# Altium PCB Steering_Wheel_ECU.PcbDoc
Units mm, origin at the board's own origin, x right, y up, seen from the top; angles counter-clockwise.
Board outline 42.72 x 25.12 mm, 2 copper layers (Top Layer, Bottom Layer); 57 components, 30 nets, 156 pads, 10 vias.
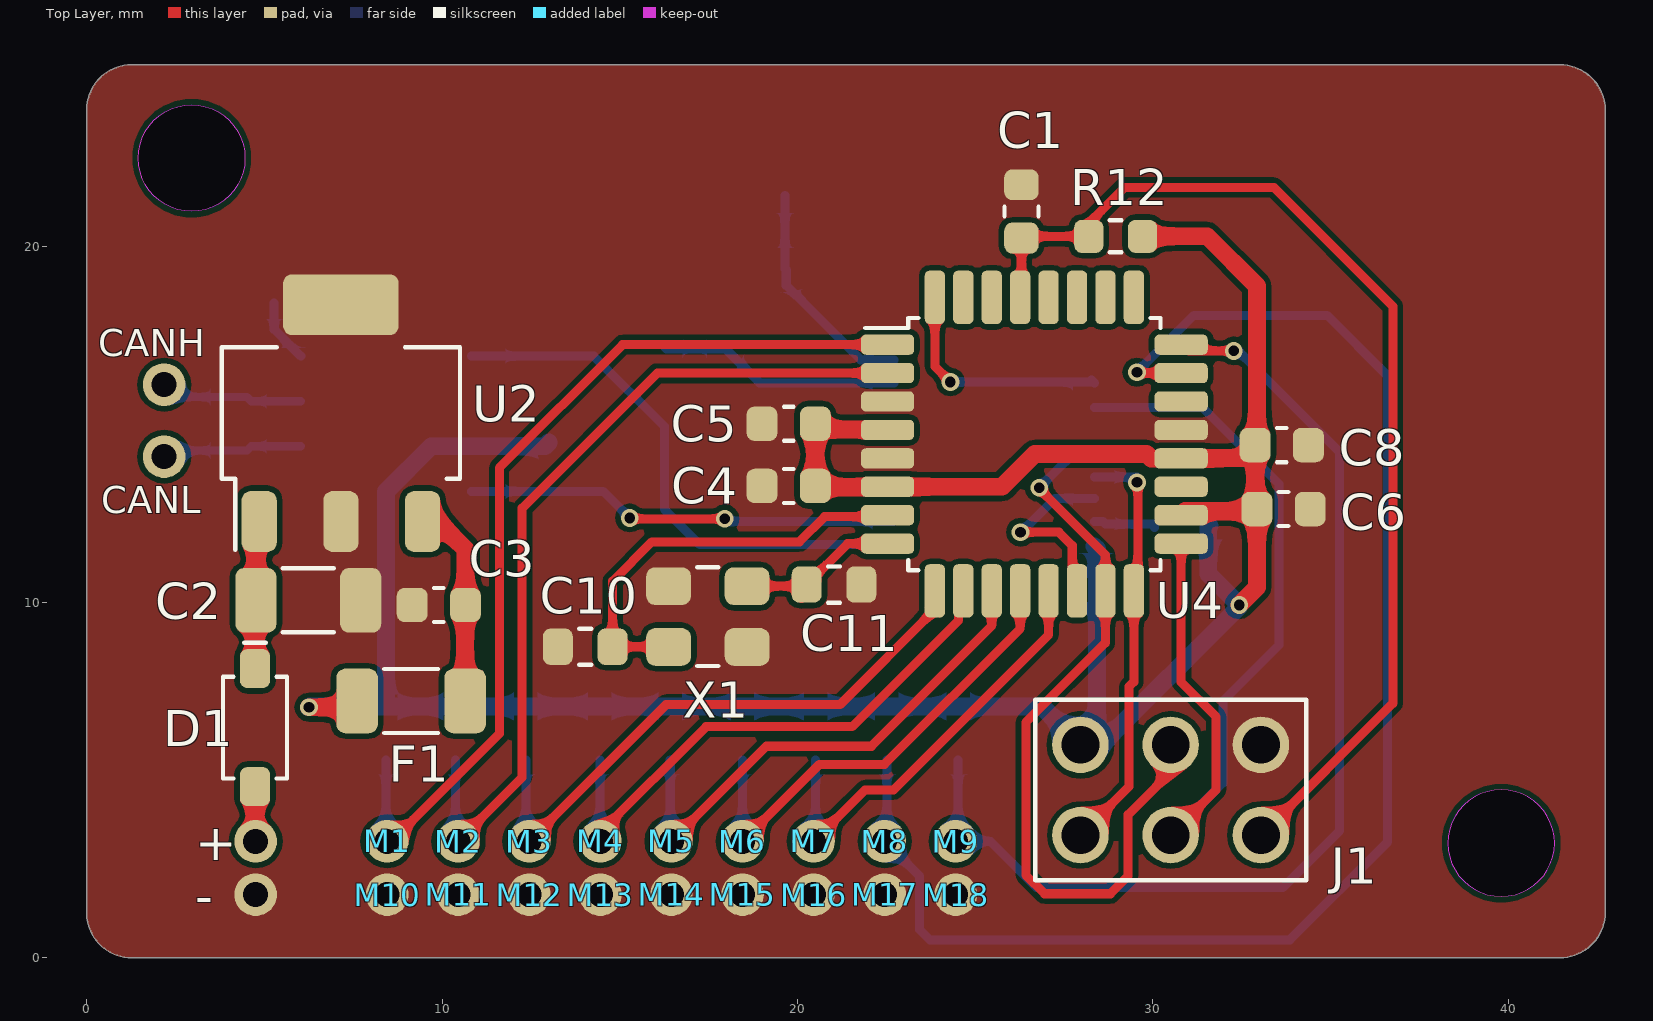
[diagram p0: Top Layer view]
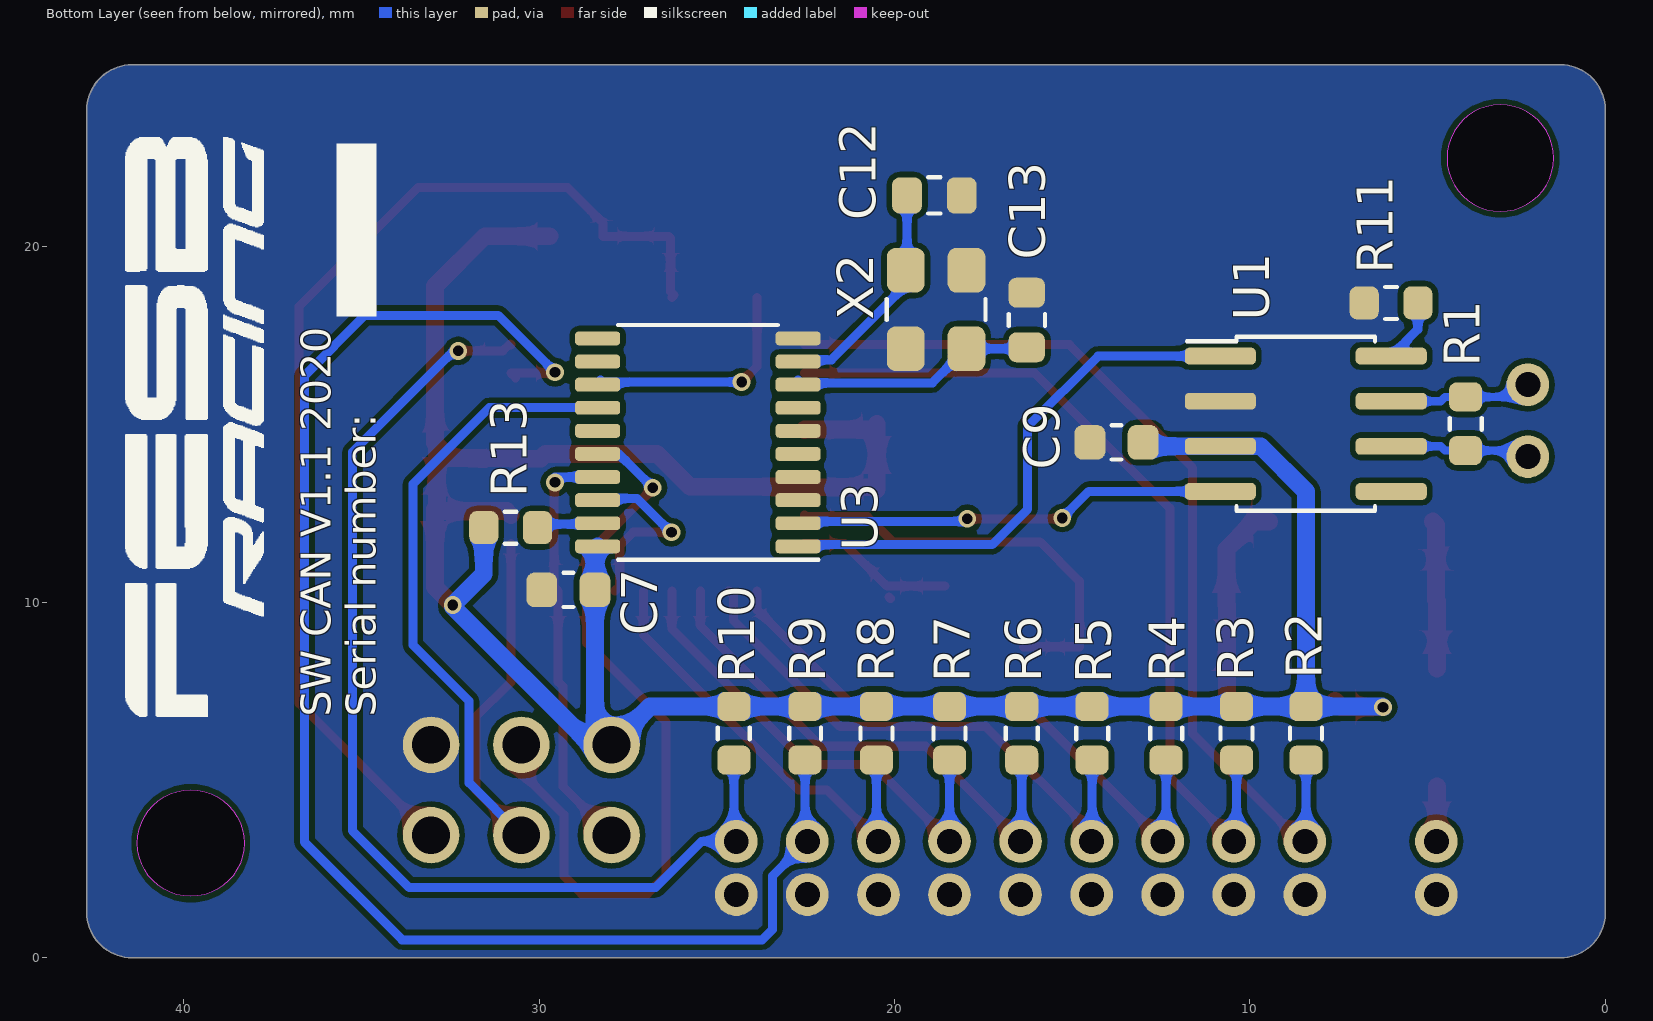
[diagram p1: Bottom Layer view, seen from below]
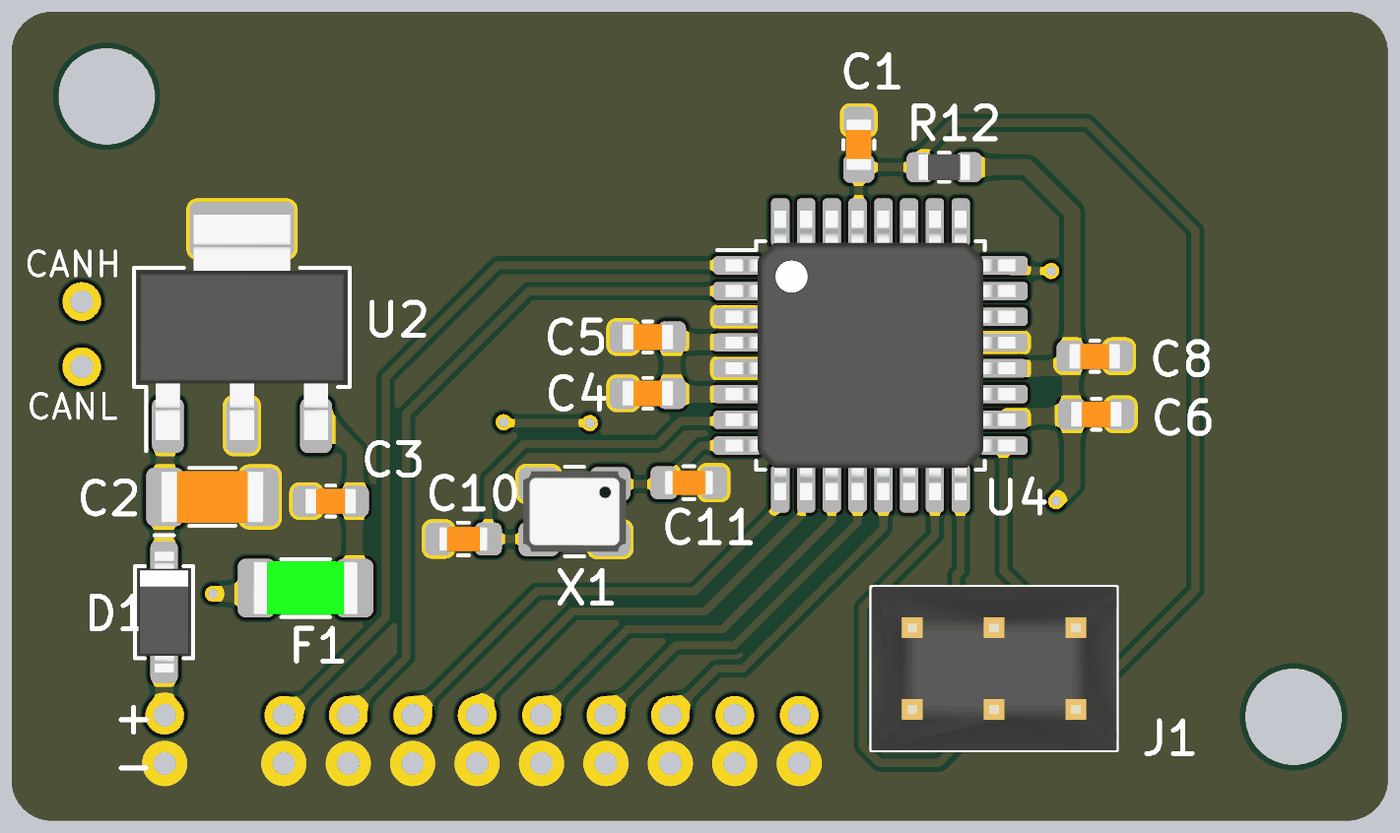
[diagram p2: 3D render of the assembled board from above, using the file's embedded part models]
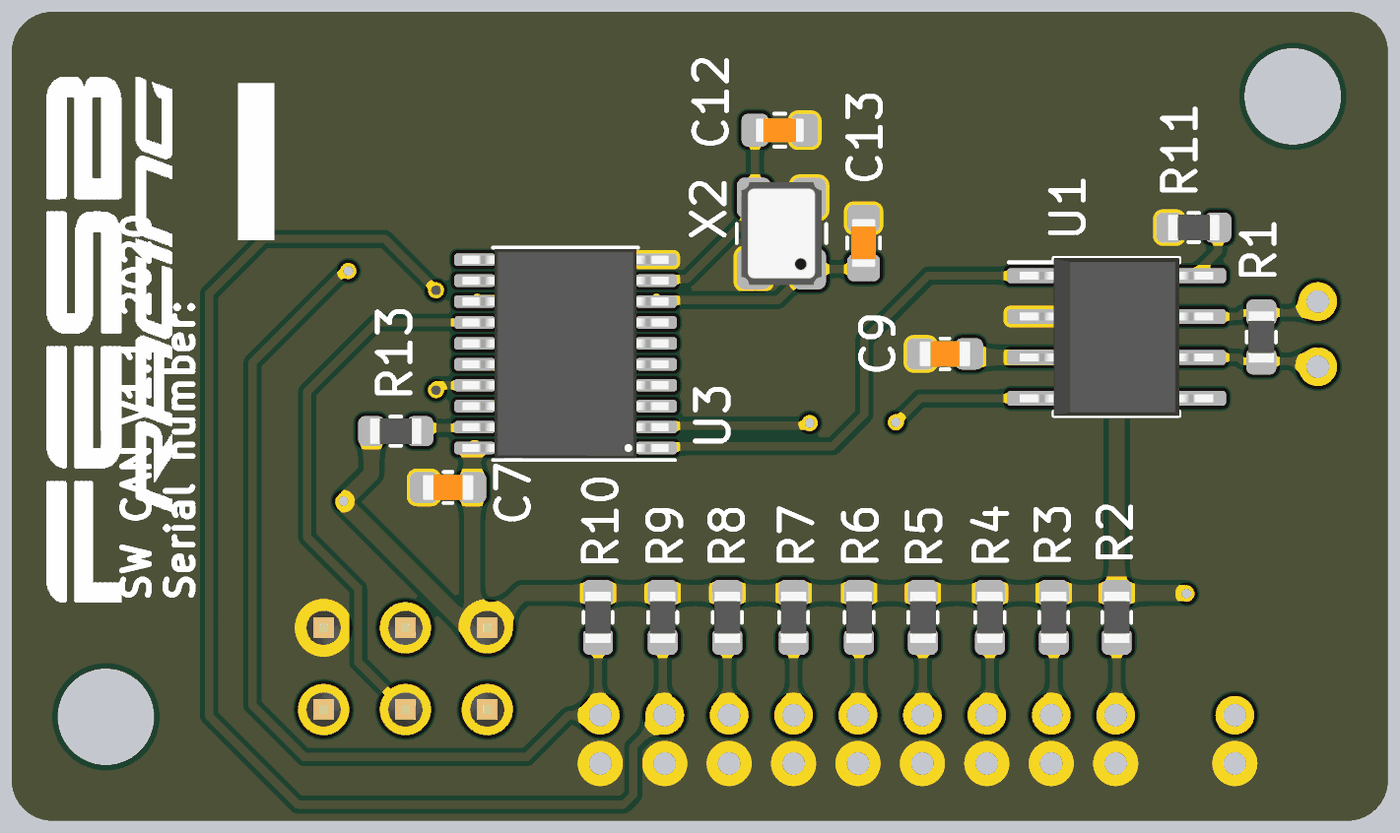
[diagram p3: 3D render of the assembled board from below, using the file's embedded part models]

## Layer stack, top to bottom
Top Solder: solder mask 0.0102, Solder Resist, Dk 3.5
Top Layer: signal copper 0.0356
Dielectric 1: dielectric 0.32, FR-4, Dk 4.8
Bottom Layer: signal copper 0.0356
Bottom Solder: solder mask 0.0102, Solder Resist, Dk 3.5

## Board outline
1.25,0 cw(c1.25,1.25) 0,1.25 0,23.875 cw(c1.25,23.875) 1.25,25.125 41.455,25.125 cw(c41.455,23.855) 42.725,23.855 42.725,1.27 cw(c41.455,1.27) 41.455,0
cut-out: 38.3,3.225 ccw(c39.8,3.225) 39.8,1.725 ccw(c39.8,3.225) 41.3,3.225 ccw(c39.8,3.225) 39.8,4.725 ccw(c39.8,3.225)
cut-out: 2.95,21 cw(c2.95,22.5) 1.45,22.5 cw(c2.95,22.5) 2.95,24 cw(c2.95,22.5) 4.45,22.5 cw(c2.95,22.5)

## Design rules (kind name [scope] priority, off if disabled: settings)
Clearance [All] p1: gap=0.15 ignorepadtopadclearanceinfootprint=FALSE except(0: Arc-Hole Track-Hole SMDPad-Hole THPad-Hole Via-Hole Fill-Hole Poly-Hole Region-Hole Text-Hole)
ComponentClearance [All] p1: gap=0 collisioncheckmode=3 verticalgap=0.254 showdistances=FALSE
DiffPairsRouting 120R [All] p1: maxlimit=0.1 minlimit=0.1 mostfreqgap=0.1 toplayer_minwidth=0.23 toplayer_maxwidth=0.23 toplayer_prefwidth=0.23 bottomlayer_minwidth=0.23 bottomlayer_maxwidth=0.23 bottomlayer_prefwidth=0.23 maxuncoupledlength=12.7
DiffPairsRouting 90R [All] p2: maxlimit=0.3 minlimit=0.2 mostfreqgap=0.2 toplayer_minwidth=1.24 toplayer_maxwidth=1.5 toplayer_prefwidth=1.24 bottomlayer_minwidth=1.24 bottomlayer_maxwidth=1.5 bottomlayer_prefwidth=1.24 maxuncoupledlength=12.7
HoleSize [All] p1: absolutevalues=TRUE maxlimit=6.3 minlimit=0.2 maxpercent=80.000 minpercent=20.000
MinimumAnnularRing [All] p1: minimumring=0.076
MinimumSolderMaskSliver [All] p1: minsoldermaskwidth=0
PlaneClearance [All] p1: clearance=0.3
PlaneConnect [All] p1: planeconnectstyle=Direct reliefexpansion=0.508 reliefentries=4 reliefconductorwidth=0.254 reliefairgap=0.254
PolygonConnect [All] p1: connectstyle=Direct reliefconductorwidth=0.254 reliefentries=4 polygonreliefangle="90 Angle" airgapwidth=0.254
RoutingVias [All] p1: holewidth=0.3 width=0.5 viastyle="Through Hole" minholewidth=0.2 minwidth=0.45 maxholewidth=0.3 maxwidth=0.5
SilkToSilkClearance [All] p1: silktosilkclearance=0.15
SilkToSolderMaskClearance [IsPad] p1: minsilkscreentomaskgap=0.1 clearancetoexposedcopper=TRUE
SolderMaskExpansion [All] p1: expansion=0.102
Width [All] p1: maxlimit=10 minlimit=0.2 preferedwidth=0.254
22 further rules are at their usual default settings.

## Classes and differential pairs
differential pair CAN: +CAN_P -CAN_N

## Components (designator, comment, footprint, x,y, rotation, side; value= is the part's Value field where it differs from the comment)
+ "0.7mm" HOLE_0.7MM#1 4.75,2.4 r0 top
- "0.7mm" HOLE_0.7MM#2 4.75,1.775 r0 top
C1 "100nF" CAPC160X80X87L35N 26.3,21 r90 top
C2 "330nF" CAPC320X160X90L50N 6.232,10.056 r180 top
C3 "100nF" CAPC160X80X87L35N 9.904,9.925 r180 top
C4 "100nF" CAPC160X80X87L35N 19.75,13.275 r180 top
C5 "100nF" CAPC160X80X87L35N 19.75,15.025 r180 top
C6 "100nF" CAPC160X80X87L35N 33.675,12.625 r0 top
C7 "100nF" CAPC160X80X87L35N 29.175,10.35 r0 bottom
C8 "100nF" CAPC160X80X87L35N 33.625,14.425 r0 top
C9 "100nF" CAPC160X80X87L35N 13.75,14.5 r0 bottom
C10 "18pF" CAPC152X76X91L25N 14.025,8.75 r180 top
C11 "18pF" CAPC152X76X91L25N 21.025,10.5 r0 top
C12 "18pF" CAPC152X76X91L25N 18.875,21.45 r180 bottom
C13 "18pF" CAPC152X76X91L25N 16.275,17.945 r90 bottom
CANH "0.7mm" HOLE_0.7MM#2 2.175,16.125 r270 top
CANL "0.7mm" HOLE_0.7MM#2 2.175,14.1 r270 top
D1 "MBR0540" SOD375X160X128L31X60N 4.733,6.474 r270 top
F1 "250mA" FUSC325X165X75L42N 9.125,7.225 r0 top
J1 "Header_2x3" HDRV6W64P254_3X2_762X508H1100N 27.96,3.45 r0 top
M1 "0.7mm" HOLE_0.7MM#2 8.45,3.275 r0 top locked
M2 "0.7mm" HOLE_0.7MM#2 10.45,3.275 r0 top locked
M3 "0.7mm" HOLE_0.7MM#2 12.45,3.275 r0 top locked
M4 "0.7mm" HOLE_0.7MM#2 14.45,3.275 r0 top locked
M5 "0.7mm" HOLE_0.7MM#2 16.45,3.275 r0 top locked
M6 "0.7mm" HOLE_0.7MM#2 18.45,3.275 r0 top locked
M7 "0.7mm" HOLE_0.7MM#2 20.45,3.275 r0 top locked
M8 "0.7mm" HOLE_0.7MM#2 22.45,3.275 r0 top locked
M9 "0.7mm" HOLE_0.7MM#2 24.45,3.275 r0 top locked
M10 "0.7mm" HOLE_0.7MM#2 8.45,1.775 r270 top locked
M11 "0.7mm" HOLE_0.7MM#2 10.45,1.775 r0 top locked
M12 "0.7mm" HOLE_0.7MM#2 12.45,1.775 r90 top locked
M13 "0.7mm" HOLE_0.7MM#2 14.45,1.775 r90 top locked
M14 "0.7mm" HOLE_0.7MM#2 16.45,1.775 r90 top locked
M15 "0.7mm" HOLE_0.7MM#2 18.45,1.775 r90 top locked
M16 "0.7mm" HOLE_0.7MM#2 20.45,1.775 r90 top locked
M17 "0.7mm" HOLE_0.7MM#2 22.45,1.775 r90 top locked
M18 "0.7mm" HOLE_0.7MM#2 24.45,1.775 r90 top locked
R1 "120R" RESC160X80X50L30N 3.925,15.025 r270 bottom
R2 "10K" RESC160X80X50L30N 8.416,6.315 r270 bottom locked
R3 "10K" RESC160X80X50L30N 10.372,6.315 r90 bottom locked
R4 "10K" RESC160X80X50L30N 12.353,6.315 r90 bottom locked
R5 "10K" RESC160X80X50L30N 14.436,6.315 r90 bottom locked
R6 "10K" RESC160X80X50L30N 16.417,6.315 r90 bottom locked
R7 "10K" RESC160X80X50L30N 18.449,6.315 r90 bottom locked
R8 "10K" RESC160X80X50L30N 20.506,6.315 r90 bottom locked
R9 "10K" RESC160X80X50L30N 22.513,6.315 r90 bottom locked
R10 "10K" RESC160X80X50L30N 24.52,6.315 r90 bottom locked
R11 "20K" RESC160X80X50L30N 6.025,18.425 r180 bottom
R12 "10K" RESC160X80X50L30N 28.95,20.3 r0 top
R13 "10K" RESC160X80X50L30N 30.8,12.1 r0 bottom
U1 "MCP2551" SOIC8P127_490X600X175L83X24N 8.425,15.025 r270 bottom
U2 "LM7805" SOT223-4P230_700X180L80X75N 7.15,15.325 r0 top locked
U3 "MCP2515T" SOP20P65_650X640X120L60X24N 25.53,14.501 r90 bottom
U4 "Atmega328p" QFP32P80_900X900X120L60X37N 26.663,14.452 r270 top
X1 "16 MHz" OSCCC320X250X60L90X110N 17.475,9.6 r180 top
X2 "16 MHz" OSCCC320X250X60L90X110N 18.827,18.24 r90 bottom

## Footprints (in the part's own frame and the unit in brackets; to place one, negate y for a bottom-side part, rotate by r counter-clockwise, add the part's x,y. Pads: shape width x height; smd on the part's side, far side on the other; paste and mask are expansions set on the pad)
CAPC152X76X91L25N [mm] "Capacitor, Chip; 1.52 mm L X 0.76 mm W X 0.91 mm H body"
  rrect50% 0.84x1.02 smd: 1(-0.77,0) 2(0.77,0)
  silkscreen extent -0.17,-0.51 0.17,0.51, body extent -1.4,-0.7 1.4,0.7, height 2
CAPC160X80X87L35N [mm] "Capacitor, Chip; 1.60 mm L X 0.80 mm W X 0.87 mm H body"
  rrect51% 0.87x0.97 smd: 1(-0.75,0) 2(0.75,0)
  silkscreen extent -0.14,-0.48 0.14,0.48, body extent -1.39,-0.69 1.39,0.69, height 0.87
CAPC320X160X90L50N [mm] "Capacitor, Chip; 3.20 mm L X 1.60 mm W X 0.90 mm H body"
  rrect43% 1.16x1.82 smd: 1(-1.475,0) 2(1.475,0)
  silkscreen extent -0.71,-0.9 0.71,0.9, body extent -2.27,-1.12 2.27,1.12, height 1
FUSC325X165X75L42N [mm] "Fuse, Chip; 3.25 mm L X 1.65 mm W X 0.75 mm H body"
  rrect43% 1.17x1.82 smd: 1(-1.52,0) 2(1.52,0)
  silkscreen extent -0.75,-0.9 0.75,0.9, body extent -2.31,-1.11 2.31,1.11, height 1
HDRV6W64P254_3X2_762X508H1100N [mm] "Header, Vertical, 2.54 mm pitch; 0.64 mm lead width, 6 pins, 2 rows, 3 pins per row, 7.62 mm L X 5.08 mm W X 11.00 mm H body"
  round 1.59 hole 1.06 paste-1.59: 1(0,0) 2(0,2.54) 3(2.54,0) 4(2.54,2.54) 5(5.08,0) 6(5.08,2.54)
  silkscreen extent -1.27,-1.27 6.35,3.81, body extent -1.52,-1.52 6.6,4.06, height 11
HOLE_0.7MM#1 [mm]
  round 1.2 hole 0.7: 1(0,0.875)
HOLE_0.7MM#2 [mm]
  round 1.2 hole 0.7: 1(0,0)
OSCCC320X250X60L90X110N [mm] "Oscillator, Corner Concave; 3.20 mm L X 2.50 mm W X 0.60 mm H body"
  rrect47% 1.26x1.06 smd: 1(-1.105,-0.855) 2(1.105,-0.855) 3(1.105,0.855) 4(-1.105,0.855)
  silkscreen extent -0.3,-1.39 0.3,1.39, body extent -2.16,-1.91 1.95,1.6, height 2
QFP32P80_900X900X120L60X37N [mm] "Quad Flat Pack (QFP), 0.80 mm pitch; square, 8 pin X 8 pin, 7.00 mm L X 7.00 mm W X 1.20 mm H body"
  rrect49% 0.57x1.5 smd: 1(-2.8,-4.13) 2(-2,-4.13) 3(-1.2,-4.13) 4(-0.4,-4.13) 5(0.4,-4.13) 6(1.2,-4.13) 7(2,-4.13) 8(2.8,-4.13) 17(2.8,4.13) 18(2,4.13) 19(1.2,4.13) 20(0.4,4.13) 21(-0.4,4.13) 22(-1.2,4.13) 23(-2,4.13) 24(-2.8,4.13)
  rrect49% 1.5x0.57 smd: 9(4.13,-2.8) 10(4.13,-2) 11(4.13,-1.2) 12(4.13,-0.4) 13(4.13,0.4) 14(4.13,1.2) 15(4.13,2) 16(4.13,2.8) 25(-4.13,2.8) 26(-4.13,2) 27(-4.13,1.2) 28(-4.13,0.4) 29(-4.13,-0.4) 30(-4.13,-1.2) 31(-4.13,-2) 32(-4.13,-2.8)
  silkscreen extent -3.55,-4.76 3.55,3.55, body extent -5.08,-5.08 5.08,5.08, height 1.2
RESC160X80X50L30N [mm] "Resistor, Chip; 1.60 mm L X 0.80 mm W X 0.50 mm H body"
  rrect51% 0.82x0.93 smd: 1(-0.755,0) 2(0.755,0)
  silkscreen extent -0.17,-0.45 0.17,0.45, body extent -1.37,-0.67 1.37,0.67, height 1
SOD375X160X128L31X60N [mm] "Diode, Small Outline Diode (SOD); 2.70 mm L X 1.60 mm W X 1.28 mm H body"
  rrect49% 1.1x0.85 smd: A(1.66,0) C(-1.66,0)
  silkscreen extent -2.39,-0.9 1.43,0.9, body extent -2.41,-1.1 2.41,1.1, height 1.28
SOIC8P127_490X600X175L83X24N [mm] "Small Outline IC (SOIC), 1.27 mm pitch; 8 pin, 4.90 mm L X 3.90 mm W X 1.75 mm H body"
  rrect51% 0.47x2 smd: 1(-1.905,-2.405) 2(-0.635,-2.405) 3(0.635,-2.405) 4(1.905,-2.405) 5(1.905,2.405) 6(0.635,2.405) 7(-0.635,2.405) 8(-1.905,2.405)
  silkscreen extent -2.45,-3.34 2.45,1.95, body extent -2.45,-3 2.45,3, height 1.75
SOP20P65_650X640X120L60X24N [mm] "Small Outline Pkg (SOP), 0.65 mm pitch; 20 pin, 6.50 mm L X 4.40 mm W X 1.20 mm H body"
  rrect51% 0.39x1.27 smd: 1(-2.925,-2.82) 2(-2.275,-2.82) 3(-1.625,-2.82) 4(-0.975,-2.82) 5(-0.325,-2.82) 6(0.325,-2.82) 7(0.975,-2.82) 8(1.625,-2.82) 9(2.275,-2.82) 10(2.925,-2.82) 11(2.925,2.82) 12(2.275,2.82) 13(1.625,2.82) 14(0.975,2.82) 15(0.325,2.82) 16(-0.325,2.82) 17(-0.975,2.82) 18(-1.625,2.82) 19(-2.275,2.82) 20(-2.925,2.82)
  silkscreen extent -3.3,-3.39 3.3,2.25, body extent -3.25,-3.2 3.25,3.2, height 1.2
SOT223-4P230_700X180L80X75N [mm] "Small Outline Transistor (SOT223), 2.30 mm pitch; 4 pin, 6.50 mm L X 3.50 mm W X 1.80 mm H body"
  rrect51% 0.99x1.71 smd: 1(-2.3,-3.05) 2(0,-3.05) 3(2.3,-3.05)
  rrect29% 3.25x1.71 smd: 2(0,3.05)
  silkscreen extent -3.35,-3.85 3.35,1.85, body extent -3.55,-4.1 3.55,4.1, height 1.8

## Part data
+ - CANH CANL M1 M2 M3 M4 M5 M6 M7 M8 M9 M10 M11 M12 M13 M14 M15 M16 M17 M18: library part Hole_0.7mm, Manufacturer Part Number=N/A, ComponentLinkDescription=N/A, FR_SN=M-05, Part Number=Hole_0.7mm, Supplier Part Number=N/A
C1 C3 C4 C5 C6 C7 C8 C9: library part C_0603_100nF_50V, Capacitor Case Style=0603, Manufacturer Part Number=CC0603MRY5V9BB104, Supplier Part Number=603-C0603MRY5V9BB104, Voltage Rating=50V, ComponentLinkDescription=Datasheet, ComponentLinkURL=https://hr.mouser.com/datasheet/2/212/KEM_C1027_X7, FR_SN=C_NP-02, Part Number=C_0603_100nF_50V
C2: library part C_1206_330nF_50V, Capacitor Case Style=1206, Manufacturer Part Number=1206B334K500CT, Supplier Part Number=791-1206B334K500CT, Voltage Rating=50V, ComponentLinkDescription=Datasheet, ComponentLinkURL=https://hr.mouser.com/datasheet/2/210/WTC_MLCC_Gen, FR_SN=C_NP-03, Part Number=C_1206_330nF_50V
C10 C11 C12 C13: library part C_0603_18pF_50V, Capacitor Case Style=0603, Manufacturer Part Number=06035U180GAT2A, Supplier Part Number=581-06035U180GAT2A, Voltage Rating=50V, ComponentLinkDescription=Datasheet, ComponentLinkURL=https://hr.mouser.com/datasheet/2/40/U-Series-8942, FR_SN=C_NP-21, Part Number=C_0603_18pF_50V
D1: Diode Case Style=SOD-123, Forward Current="500 mA", Max Reverse Voltage="40 V", Supplier Part Number=512-MBR0540, ComponentLinkDescription=Datasheet, ComponentLinkURL=https://hr.mouser.com/datasheet/2/308/MBR0540-1306677.pdf, FR_SN=D_S-01, Manufacturer Part Number=MBR0540, Part Number=MBR0540
F1: library part F_250mA, Fuse Case Style=1206, Holding Current=500mA, Manufacturer Part Number=0ZCJ0025FF2E, Supplier Part Number=530-0ZCJ0025FF2E, ComponentLinkDescription=Datasheet, ComponentLinkURL=https://hr.mouser.com/datasheet/2/643/0ZCJ_Nov2016-1132002.pdf, FR_SN=F-01, Part Number=F_250mA, Tripping Current=250mA
J1: Manufacturer Part Number=M20-9970345, Supplier Part Number=855-M20-9970345, ComponentLinkDescription=Datasheet, ComponentLinkURL=https://hr.mouser.com/datasheet/2/181/M20-997-1133533.pdf, FR_SN=J-02, Part Number=Header_2x3
R1: library part R_0805_120R_0W5, Manufacturer Part Number=SG73G2ATTD1200D, Power Rating=500mW, Resistor Case Style=0805, Supplier Part Number=660-SG73G2ATTD1200D, Temperature Coefficient="50 PPM / C", ComponentLink1Description=Datasheet, ComponentLink1URL=https://hr.mouser.com/datasheet/2/219/SG73G-1316861.pdf, FR_SN=R-20, Part Number=R_0805_120R_0W5
R2 R3 R4 R5 R6 R7 R8 R9 R10 R12 R13: library part R_0603_10K_0W062_P, Manufacturer Part Number=APC0603B10K0N, Power Rating=62.5mW, Resistor Case Style=0603, Supplier Part Number=284-APC0603B10K0N, Temperature Coefficient="25 PPM / C", ComponentLink1Description=Datasheet, ComponentLink1URL=https://hr.mouser.com/datasheet/2/303/APC-1-15.34-911303.pdf, FR_SN=R-11, Part Number=R_0603_10K_0W062_P
R11: library part R_0603_20K_0W1, Manufacturer Part Number=RT0603DRE0720KL, Power Rating=100mW, Resistor Case Style=0603, Supplier Part Number=603-RT0603DRE0720KL, Temperature Coefficient="50 PPM / C", ComponentLink1Description=Datasheet, ComponentLink1URL=https://hr.mouser.com/datasheet/2/447/PYu-RT_1-to-0.01_RoHS_L_9-1222720.pdf, FR_SN=R-04, Part Number=R_0603_20K_0W1
U1: IC Case Style=SOIC-8, Manufacturer Part Number=MCP2551-I/SN, Supplier Part Number=579-MCP2551-I/SN, Category="Hi Spd CAN Transceiver", ComponentLinkDescription=Datasheet, ComponentLinkURL=https://hr.mouser.com/datasheet/2/268/20001667G-1115479.pdf, FR_SN=IC_Misc-04, Part Number=MCP2551
U2: library part U_5V, IC Case Style=SOT223, Manufacturer Part Number=UA78M05CDCYR, Max Input Voltage=35V, Output Current=1.5A, Output Voltage=5V, Supplier Part Number=595-UA78M05CDCYR, Category="Fixed Positive Voltage Regulator", ComponentLinkDescription=Datasheet, ComponentLinkURL=http://www.ti.com/lit/ds/symlink/lm340.pdf, FR_SN=U_REG-01, Part Number=U_5V
U3: library part MCP2515, IC Case Style=TSSOP-20, Manufacturer Part Number=MCP2515T-I/ST, Supplier Part Number=579-MCP2515T-I/ST, Category="CAN Controller with SPI Interface", ComponentLinkDescription=Datasheet, ComponentLinkURL=https://hr.mouser.com/datasheet/2/268/20001801H-708845.pdf, FR_SN=IC_Misc-03, Part Number=MCP2515
U4: IC Case Style=TQFP-32, Manufacturer Part Number=ATMEGA328P-AUR, Supplier Part Number=556-ATMEGA328P-AUR, Category="Arduino Nano MCU", ComponentLinkDescription=Datasheet, ComponentLinkURL=https://hr.mouser.com/datasheet/2/268/40001906A-1222909.pdf, FR_SN=MCU-01, Part Number=Atmega328p
X1 X2: library part X_16MHZ_9pF, Frequency=16MHz, Frequency Tolerance="10 PPM", Manufacturer Part Number="TSX-3225 16.0000MF09Z-AC3", Supplier Part Number=732-TX325-16F09Z-AC3, ComponentLinkDescription=Datasheet, ComponentLinkURL=https://hr.mouser.com/datasheet/2/137/A-238_en-932914.pdf, FR_SN=X-09, Part Number=X_16MHZ_9pF

## Via types
v1: diameter 0.5, hole 0.3, Top Layer to Bottom Layer, 10 vias

## Nets (pads, with @x,y where several pads share a name; then routed paths per layer and width w, separated by ;. In a path a pad name is that pad's centre, name@x,y a point inside that pad or via, vN(x,y) a via of type N, cw(c..) or ccw(c..) an arc to the next point about the centre after c; other vN are vias at no path point)
CAN_N: CANL.1 R1.2 U1.6 | length 4
  Bottom Layer w0.23: CANL.1 2.345,14.27 R1.2 4.505,14.27 4.625,14.39 U1.6
CAN_P: CANH.1 R1.1 U1.7 | length 4
  Bottom Layer w0.23: CANH.1 2.52,15.78 R1.1 4.505,15.78 4.625,15.66 U1.7
GND: -.1 C1.2 C2.1 C3.2 C4.2 C5.2 C6.2 C7.2 C8.2 C9.2 C10.2 C11.2 C12.2 C13.2 J1.6 M10.1 M11.1 M12.1 M13.1 M14.1 M15.1 M16.1 M17.1 M18.1 R11.1 U1.2 U2.2 U3.10 U4.3 U4.5 U4.21 X1.2 X1.4 X2.2 X2.4
INT: U3.13 U4.32 | length 6.7
  Top Layer w0.254: U4.32 23.863,16.637 v1(24.3,16.2)
  Bottom Layer w0.254: v1(24.3,16.2) 28.227,16.2 28.276,16.249 U3.13@28.35,16.175
M1: M1.1 R2.2 U4.1 | length 26.6
  Top Layer w0.254: M1.1 8.581,3.275 11.611,6.305 11.611,13.786 15.077,17.252 U4.1
  Bottom Layer w0.254: R2.2 8.416,3.309 M1.1
M2: M2.1 R3.1 U4.2 | length 24.9
  Top Layer w0.254: M2.1@10.925,3.137 10.925,3.275 M2.1 12.25,5.075 12.25,12.65 16.052,16.452 U4.2
  Bottom Layer w0.254: M2.1@10.35,3.275 10.372,3.297 R3.1
M3: M3.1 R4.1 U4.9 | length 16.9
  Top Layer w0.254: M3.1 16.3,7.125 21.2,7.125 23.863,9.788 U4.9
  Bottom Layer w0.254: M3.1@12.35,3.275 12.353,3.278 R4.1
M4: M4.1 R5.1 U4.10 | length 16
  Top Layer w0.254: M4.1 14.45,3.525 17.425,6.5 21.533,6.5 24.529,9.496 24.529,10.188 U4.10
  Bottom Layer w0.254: M4.1@14.436,3.289 R5.1
M5: M5.1 R6.1 U4.11 | length 14.8
  Top Layer w0.254: M5.1 19.125,5.95 22.075,5.95 25.463,9.338 U4.11
  Bottom Layer w0.254: R6.1 16.417,3.308 M5.1
M6: M6.1 R7.1 U4.12 | length 13.6
  Top Layer w0.254: M6.1 20.617,5.442 22.442,5.442 26.263,9.263 U4.12
  Bottom Layer w0.254: R7.1 18.449,3.276 M6.1
M7: M7.1 R8.1 U4.13 | length 12.6
  Top Layer w0.254: M7.1 21.9,4.725 22.7,4.725 27.063,9.088 U4.13
  Bottom Layer w0.254: M7.1 20.506,3.331 R8.1
M8: M8.1 R9.1 U4.23 | length 42.6
  Top Layer w0.254: v1(29.55,16.475) 29.573,16.452 U4.23 U4.23@30.659,16.318
  Bottom Layer w0.254: R9.1 22.513,3.338 M8.1 23.425,2.3 23.425,0.8 23.725,0.5 33.85,0.5 36.6,3.25 36.6,16.375 34.9,18.075 31.15,18.075 v1(29.55,16.475)
M9: M9.1 R10.1 U4.24 | length 30.7
  Top Layer w0.254: U4.24@30.787,17.246 U4.24 30.816,17.275 31.016,17.075 v1(32.275,17.075)
  Bottom Layer w0.254: M9.1 M9.1@24.55,3.275 ; R10.1 24.52,3.305 M9.1@24.55,3.275 ; v1(32.275,17.075) 32.4,17.075 35.25,14.225 35.25,3.575 33.65,1.975 26.725,1.975 25.425,3.275 M9.1@24.55,3.275
MISO: J1.1 U3.17 U4.16 | length 12
  Top Layer w0.254: J1.1 29.324,4.814 29.324,7.625 29.463,7.764 U4.16 29.575,10.434 29.575,13.399 v1(29.551,13.376)
  Bottom Layer w0.254: U3.17 29.551,13.526 v1(29.551,13.376)
MOSI: J1.4 U3.16 U4.15 | length 22.1
  Top Layer w0.254: v1(26.8,13.225) 26.775,13.225 28.663,11.337 U4.15 28.663,8.863 26.425,6.625 26.425,2.325 26.95,1.8 28.8,1.8 29.3,2.3 29.3,4.025 30.5,5.225 J1.4
  Bottom Layer w0.254: v1(26.8,13.225) 27.751,14.176 U3.16
Net+_1: +.1 D1.A | length 1.5
  Top Layer w0.5: D1.A 4.733,3.292 +.1
NetC2_2: C2.2 D1.C U2.1 | length 4.2
  Top Layer w0.5: D1.C 4.733,10.032 C2.2 4.757,12.182 U2.1
NetC3_1: C3.1 F1.2 U2.3 | length 5.8
  Top Layer w0.254: C3.1@10.645,9.916 C3.1
  Top Layer w0.5: U2.3 9.875,12.275 10.654,11.496 C3.1 ; F1.2 C3.1@10.645,9.916
NetC10_1: C10.1 U4.7 X1.3 | length 11.9
  Top Layer w0.254: X1.3@16.365,8.75 C10.1 14.795,10.595 15.9,11.7 20.05,11.7 20.759,12.409 22.533,12.409 U4.7
NetC11_1: C11.1 U4.8 X1.1 | length 4.6
  Top Layer w0.254: X1.1 20.21,10.455 C11.1 21.407,11.652 U4.8 U4.8@22.607,11.578 ; C11.1@20.11,10.105 C11.1@20.155,10.15
NetC12_1: C12.1 U3.9 X2.3 | length 6.4
  Bottom Layer w0.254: C12.1 19.645,19.382 X2.3 19.682,18.918 21.775,16.825 U3.9@22.71,16.825
NetC13_1: C13.1 U3.8 X2.1 | length 6.9
  Bottom Layer w0.254: C13.1 16.315,17.135 X2.1 18.932,16.175 22.71,16.175 U3.8@22.71,16.249
NetR11_2: R11.2 U1.8 | length 1.8
  Bottom Layer w0.254: R11.2 5.27,17.68 U1.8
NetR13_1: R13.1 U3.19 | length 1.8
  Bottom Layer w0.254: U3.19@28.35,12.275 28.592,12.275 28.666,12.201 30.045,12.201 R13.1
NetU1_1: U1.1 U3.1 | length 15.4
  Bottom Layer w0.254: U1.1 14.27,16.93 16.25,14.95 16.25,12.625 17.25,11.625 U3.1@22.71,11.625
NetU1_4: U1.4 U3.2 | length 12.2
  Top Layer w0.254: v1(15.275,12.375) 15.3,12.35 v1(17.95,12.35)
  Bottom Layer w0.254: U1.4 14.53,13.12 v1(15.275,12.375) ; v1(17.95,12.35) 18.025,12.275 U3.2@22.71,12.275
RST: C1.1 J1.5 R12.1 U4.29 | length 30.8
  Top Layer w0.254: U4.29 26.2,18.645 26.3,18.745 C1.1 26.35,20.3 R12.1 28.195,20.67 29.2,21.675 33.4,21.675 36.75,18.325 36.75,7.16 J1.5
SCK: J1.3 U3.14 U4.17 | length 26.4
  Top Layer w0.254: J1.3 31.775,4.725 31.775,6.775 30.793,7.757 U4.17
  Bottom Layer w0.254: U3.14 31.399,15.476 33.55,13.325 33.55,8.8 31.968,7.218 31.968,4.918 J1.3
SS: U3.18 U4.14 | length 5.4
  Top Layer w0.254: v1(26.275,11.975) 27.35,11.975 27.729,11.596 27.729,10.456 U4.14
  Bottom Layer w0.254: v1(26.275,11.975) 26.295,11.975 27.245,12.925 U3.18@28.35,12.925
VCC: C4.1 C5.1 C6.1 C7.1 C8.1 C9.1 F1.1 J1.2 R2.1 R3.2 R4.2 R5.2 R6.2 R7.2 R8.2 R9.2 R10.2 R12.2 R13.2 U1.3 U3.20 U4.4 U4.6 U4.18 U4.20 | length 81.4
  Top Layer w0.5: v1(6.25,7.05) 7.43,7.05 F1.1 ; C4.1@20.5,13.175 C4.1@20.5,13.241 ; C5.1 C5.1@20.5,14.863 ; U4.4 22.522,14.863 C5.1@20.5,14.863 ; R12.2 31.525,20.3 32.925,18.9 32.925,14.475 C8.1 ; U4.18 30.908,12.567 C6.1@32.925,12.567 ; v1(32.425,9.925) 32.925,10.425 C6.1@32.925,12.567 ; C4.1@20.5,13.241 22.522,13.241 U4.6 25.752,13.252 26.674,14.174 29.82,14.174 29.953,14.041 30.782,14.041 U4.20 32.502,14.052 C8.1 ; C4.1@20.5,13.241 C4.1 C5.1@20.5,14.863 ; C8.1 32.875,12.675 C6.1 C6.1@32.925,12.567
  Bottom Layer w0.5: v1(6.25,7.05) 6.27,7.07 R2.1 ; C9.1 12.89,14.39 U1.3 9.69,14.39 8.416,13.116 R2.1 ; U3.20 28.425,11.501 C7.1 28.425,6.455 J1.2 ; R13.2@31.6,12.145 R13.2 31.555,10.795 v1(32.425,9.925) 32.425,9.875 28.54,5.99 J1.2 ; R2.1 R3.2 R4.2 R5.2 R6.2 R7.2 R8.2 R9.2 R10.2 26.88,7.07 J1.2
pads on no net: U1.5 U3.3 U3.4 U3.5 U3.6 U3.7 U3.11 U3.12 U3.15 U4.19 U4.22 U4.25 U4.26 U4.27 U4.28 U4.30 U4.31

## Polygon pours and split planes (outlines as drawn)
GND on Top Layer "Top Layer-No Net" (solid, pour order 2): 1.25,0 cw(c1.25,1.25) 0,1.25 0,23.875 cw(c1.25,23.875) 1.25,25.125 41.455,25.125 cw(c41.455,23.855) 42.725,23.855 42.725,1.27 cw(c41.455,1.27) 41.455,0
GND on Bottom Layer "Top Layer-No Net" (solid, pour order 4): 1.25,0 cw(c1.25,1.25) 0,1.25 0,23.875 cw(c1.25,23.875) 1.25,25.125 41.455,25.125 cw(c41.455,23.855) 42.725,23.855 42.725,1.27 cw(c41.455,1.27) 41.455,0

## Silkscreen, mask and mechanical layers (free items; w line width, h text height)
Bottom Overlay:
  drawing of 728 lines, arcs and shapes, not listed
  text "SW CAN V1.1 2020 / Serial number:" at 34.599,6.787 h0.84 r270
Mechanical 1:
  circle w0.01: c39.8,3.225 r1.5
  circle w0.01: c2.95,22.5 r1.5
  lines w0.01: 0,1.25 ccw(c1.25,1.25) 1.25,0 40.25,0 41.455,0 ccw(c41.455,1.27) 42.725,1.27 42.725,23.855 ccw(c41.455,23.855) 41.455,25.125 40,25.125 1.25,25.125 ccw(c1.25,23.875) 0,23.875 0,1.25